# Altium PCB pcb_tigresse_experiment.PcbDoc
Units mil, origin at the board's own origin, x right, y up, seen from the top; angles counter-clockwise.
Board outline 2561.78 x 2561.78 mil, 6 copper layers (TopSIGN, TopGND, 3V3, SignCenter, BottomGND, BottomsSIGN), stack 32.112 mil thick; 48 components, 34 nets, 193 pads, 1 vias.
Unrouted connection lines stored in the file: 27.
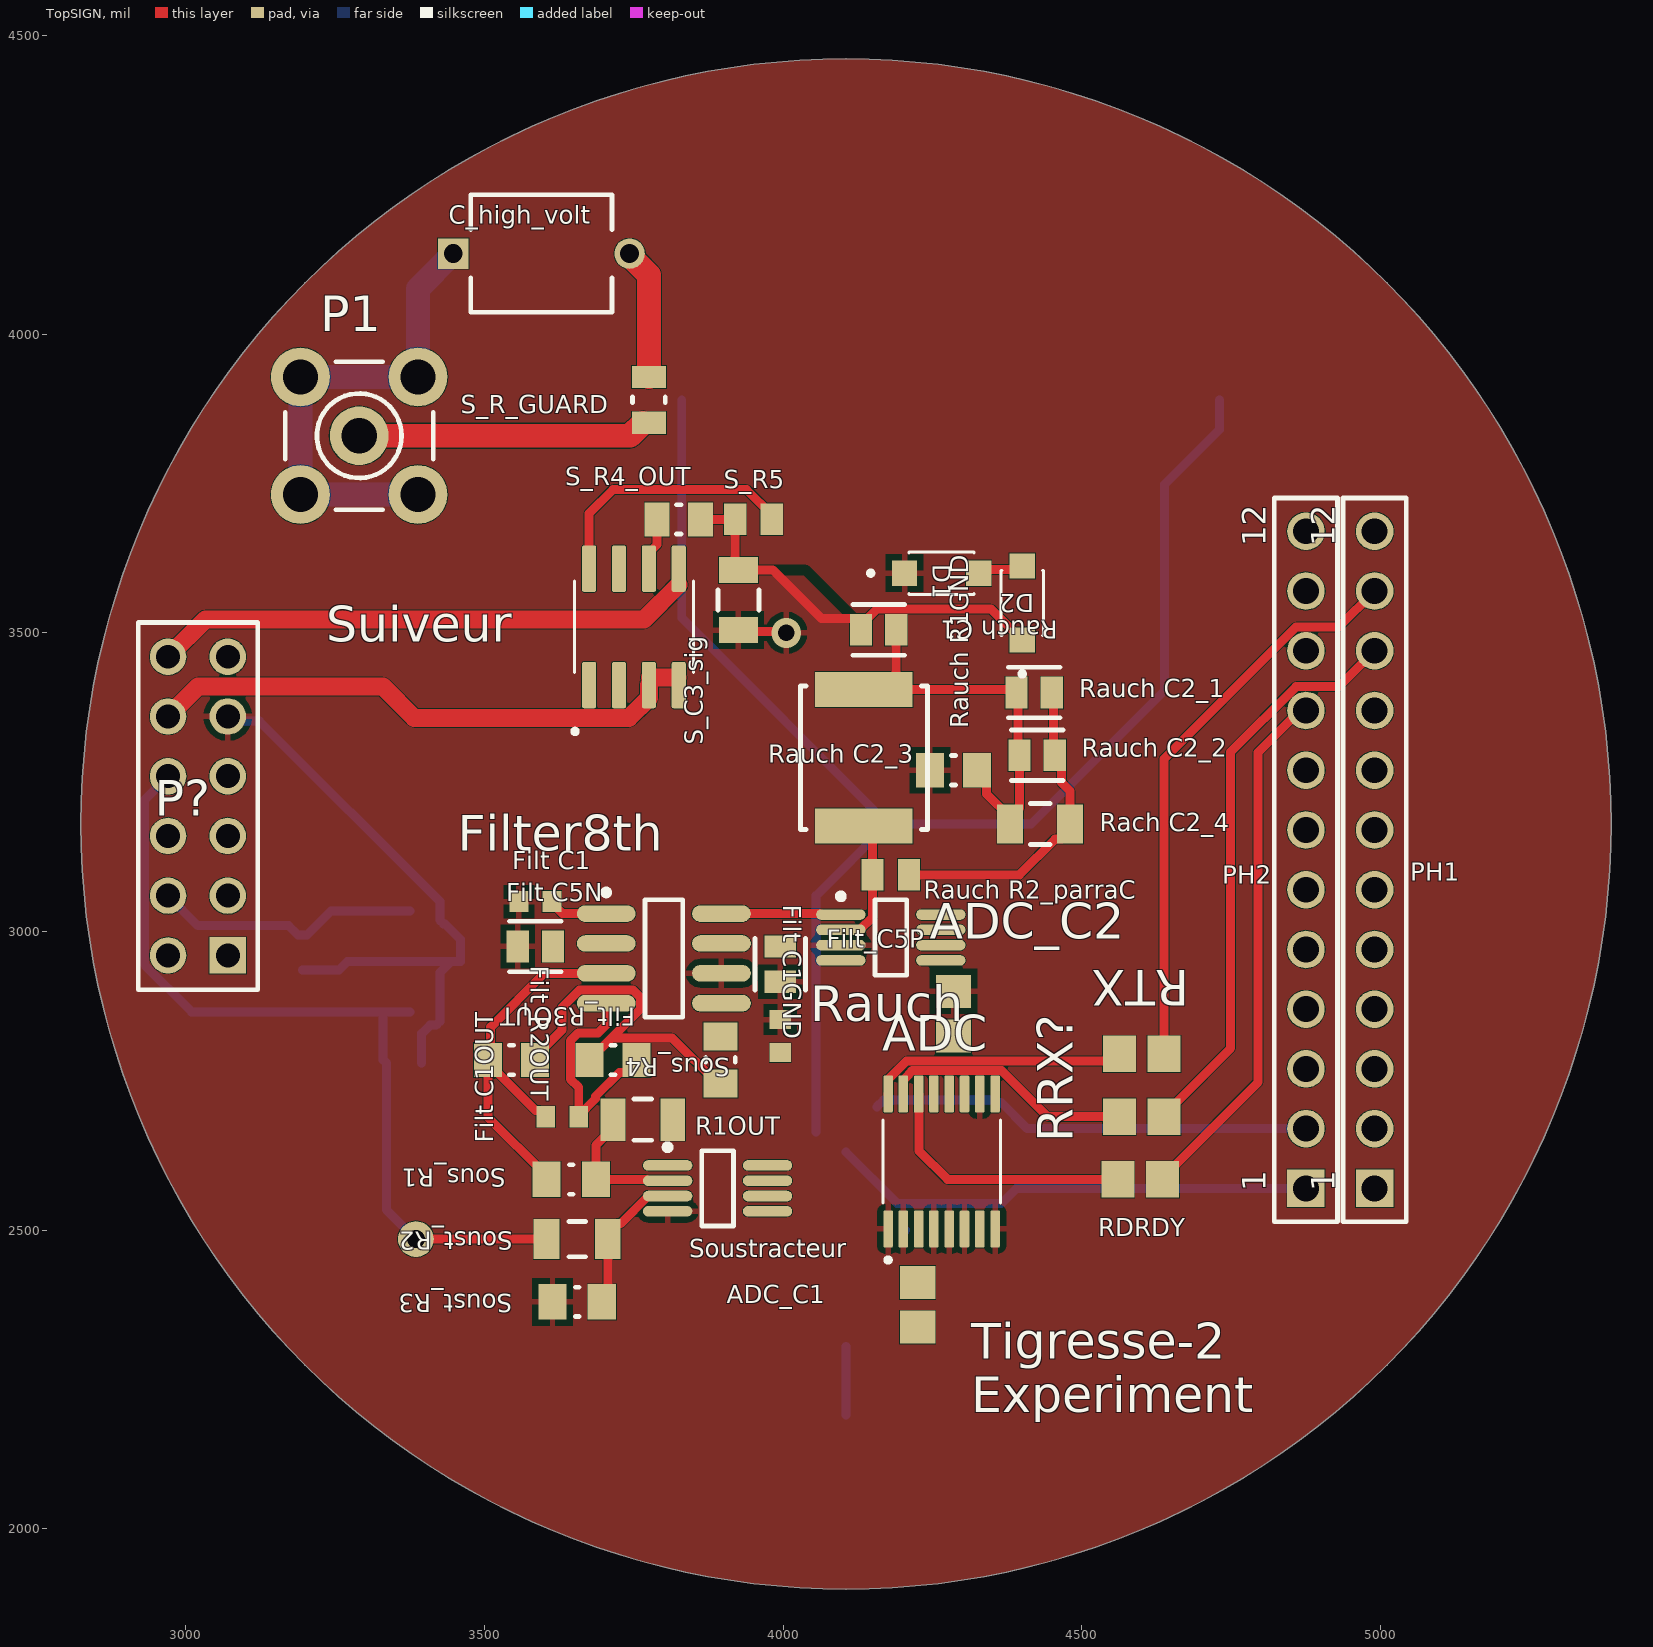
[diagram p0: TopSIGN view]
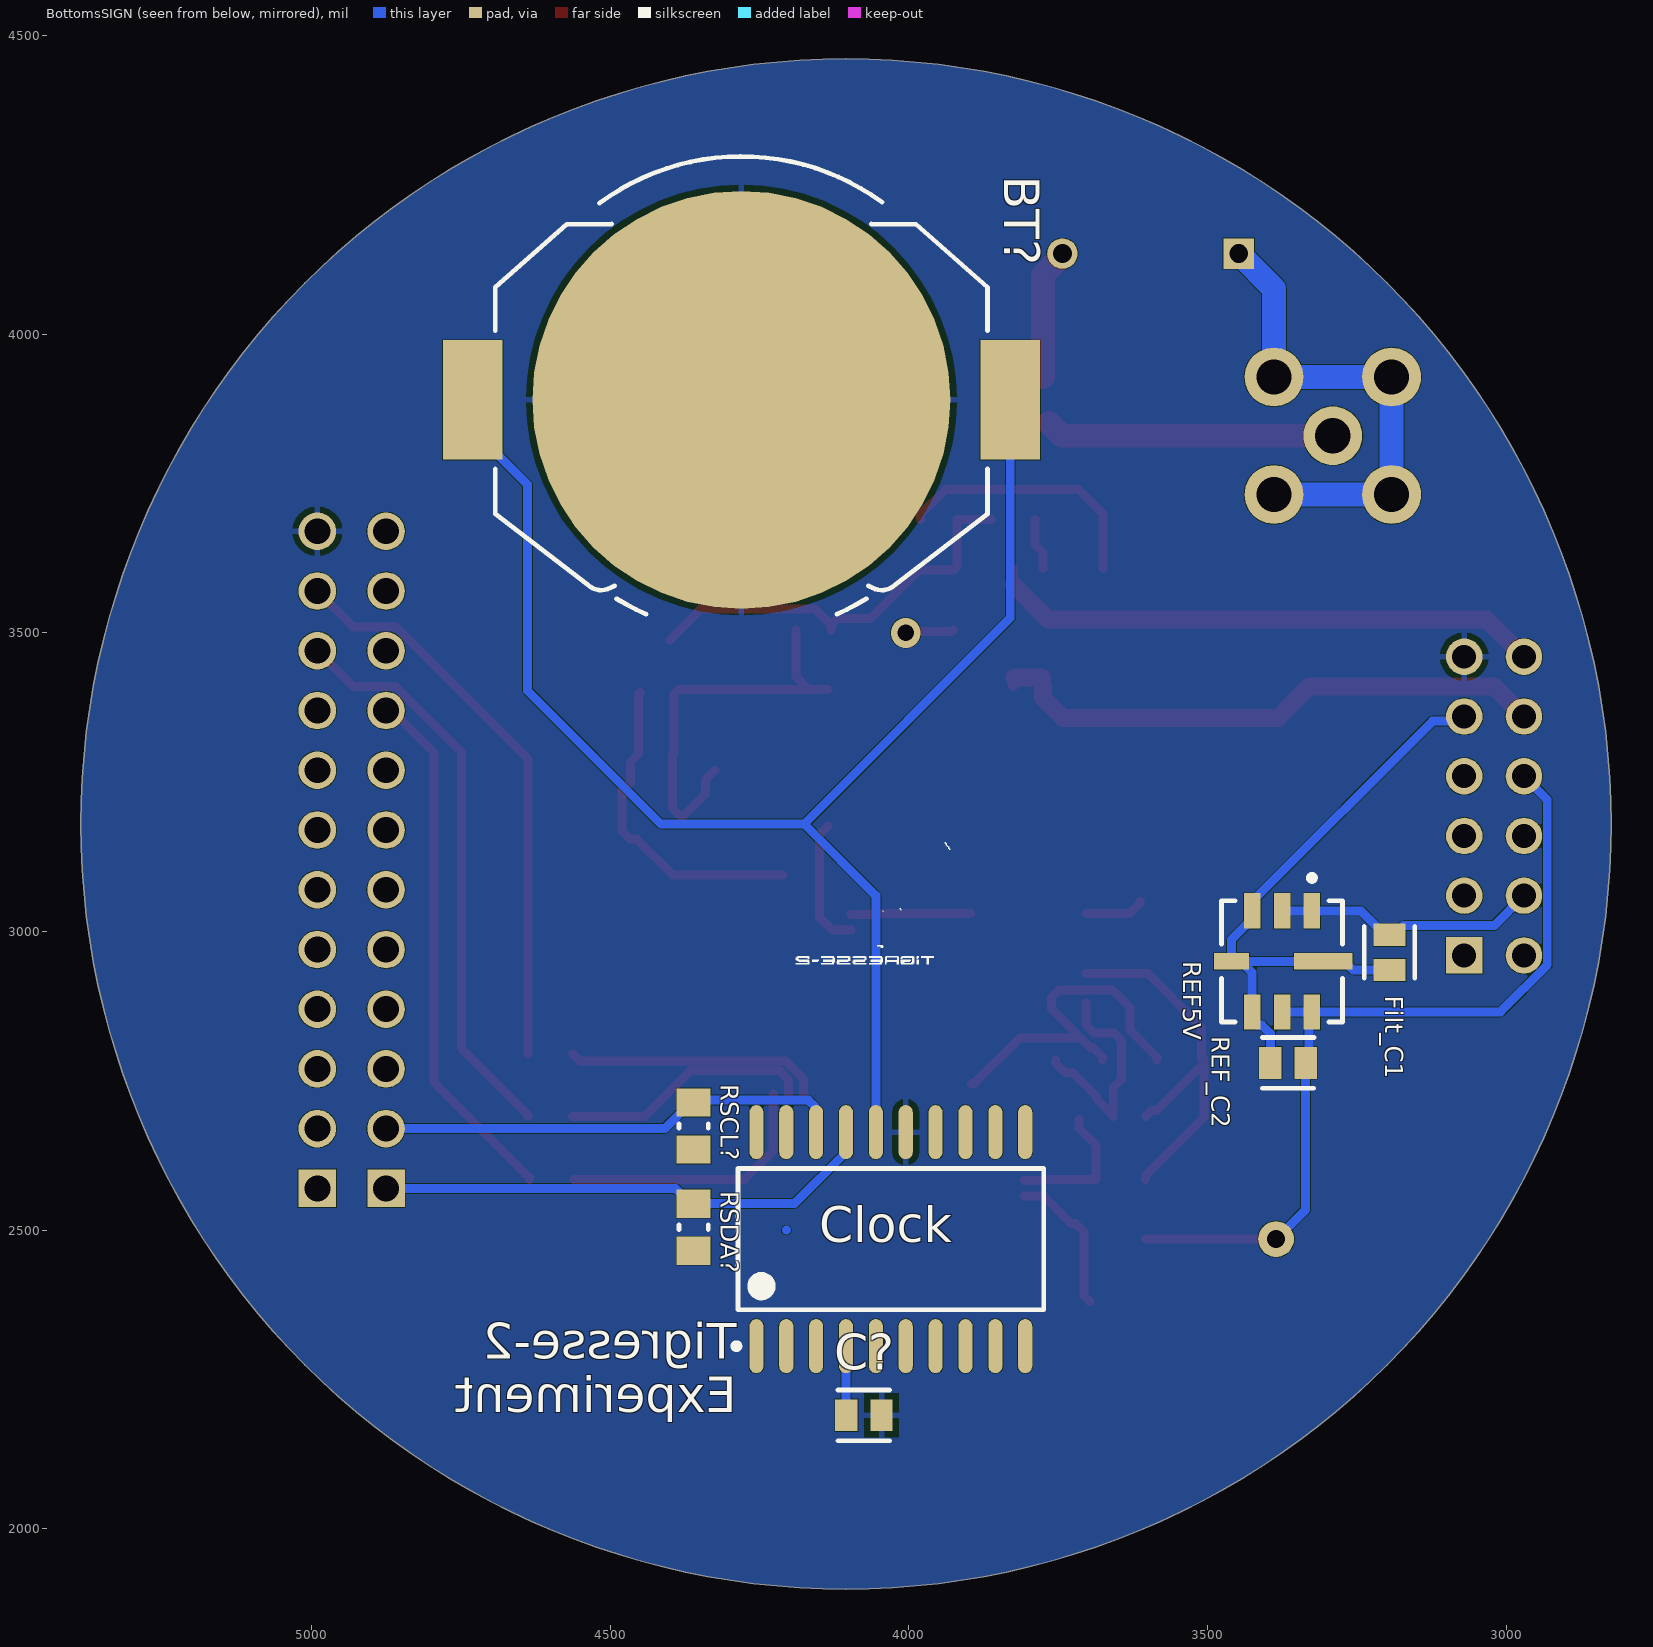
[diagram p1: BottomsSIGN view, seen from below]
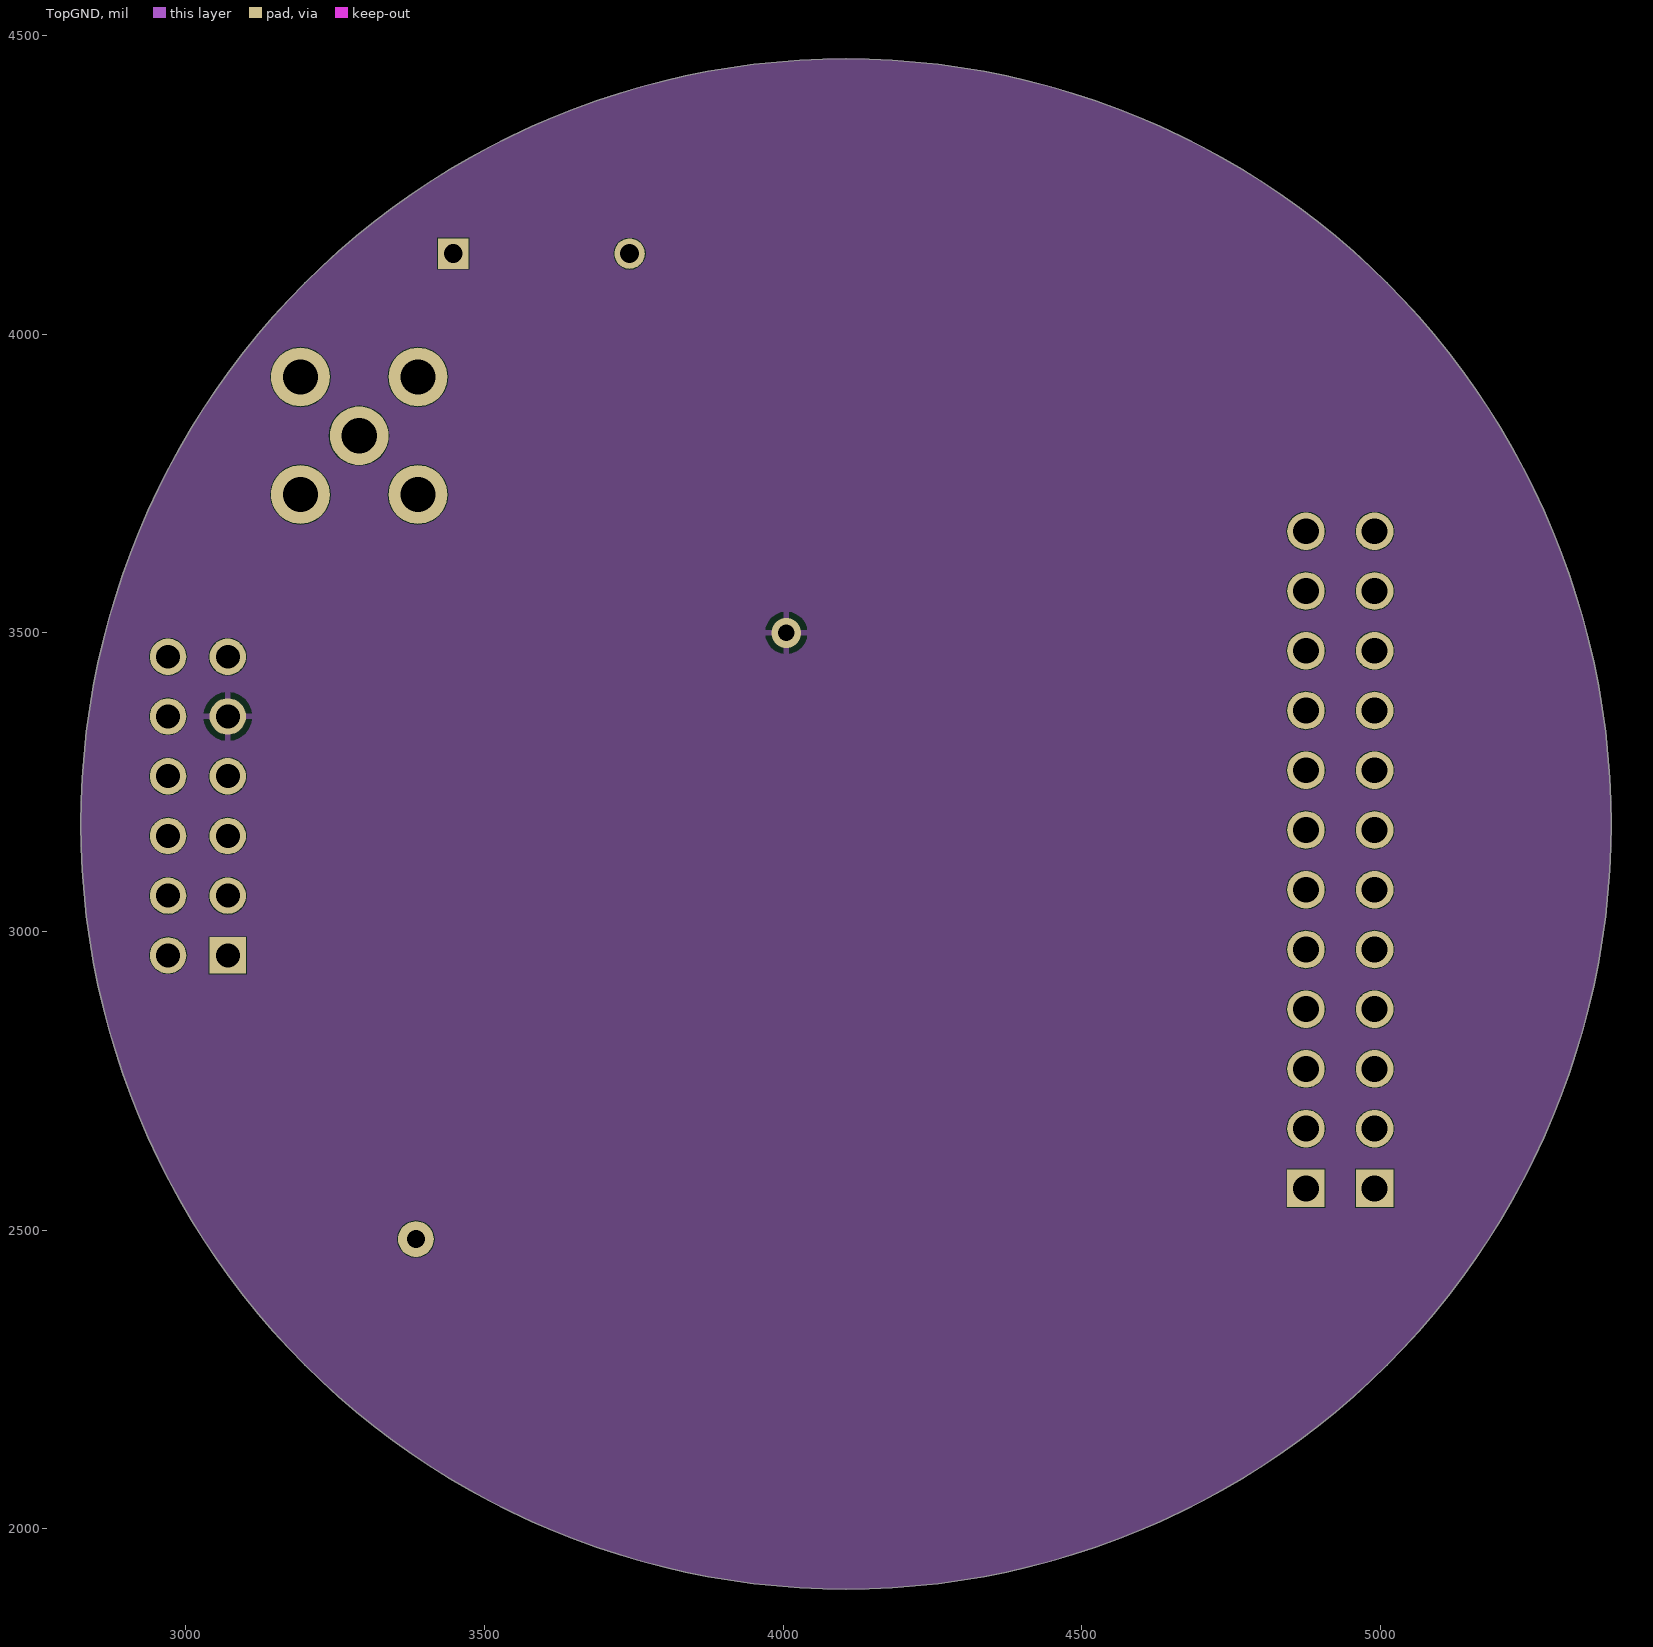
[diagram p2: TopGND]
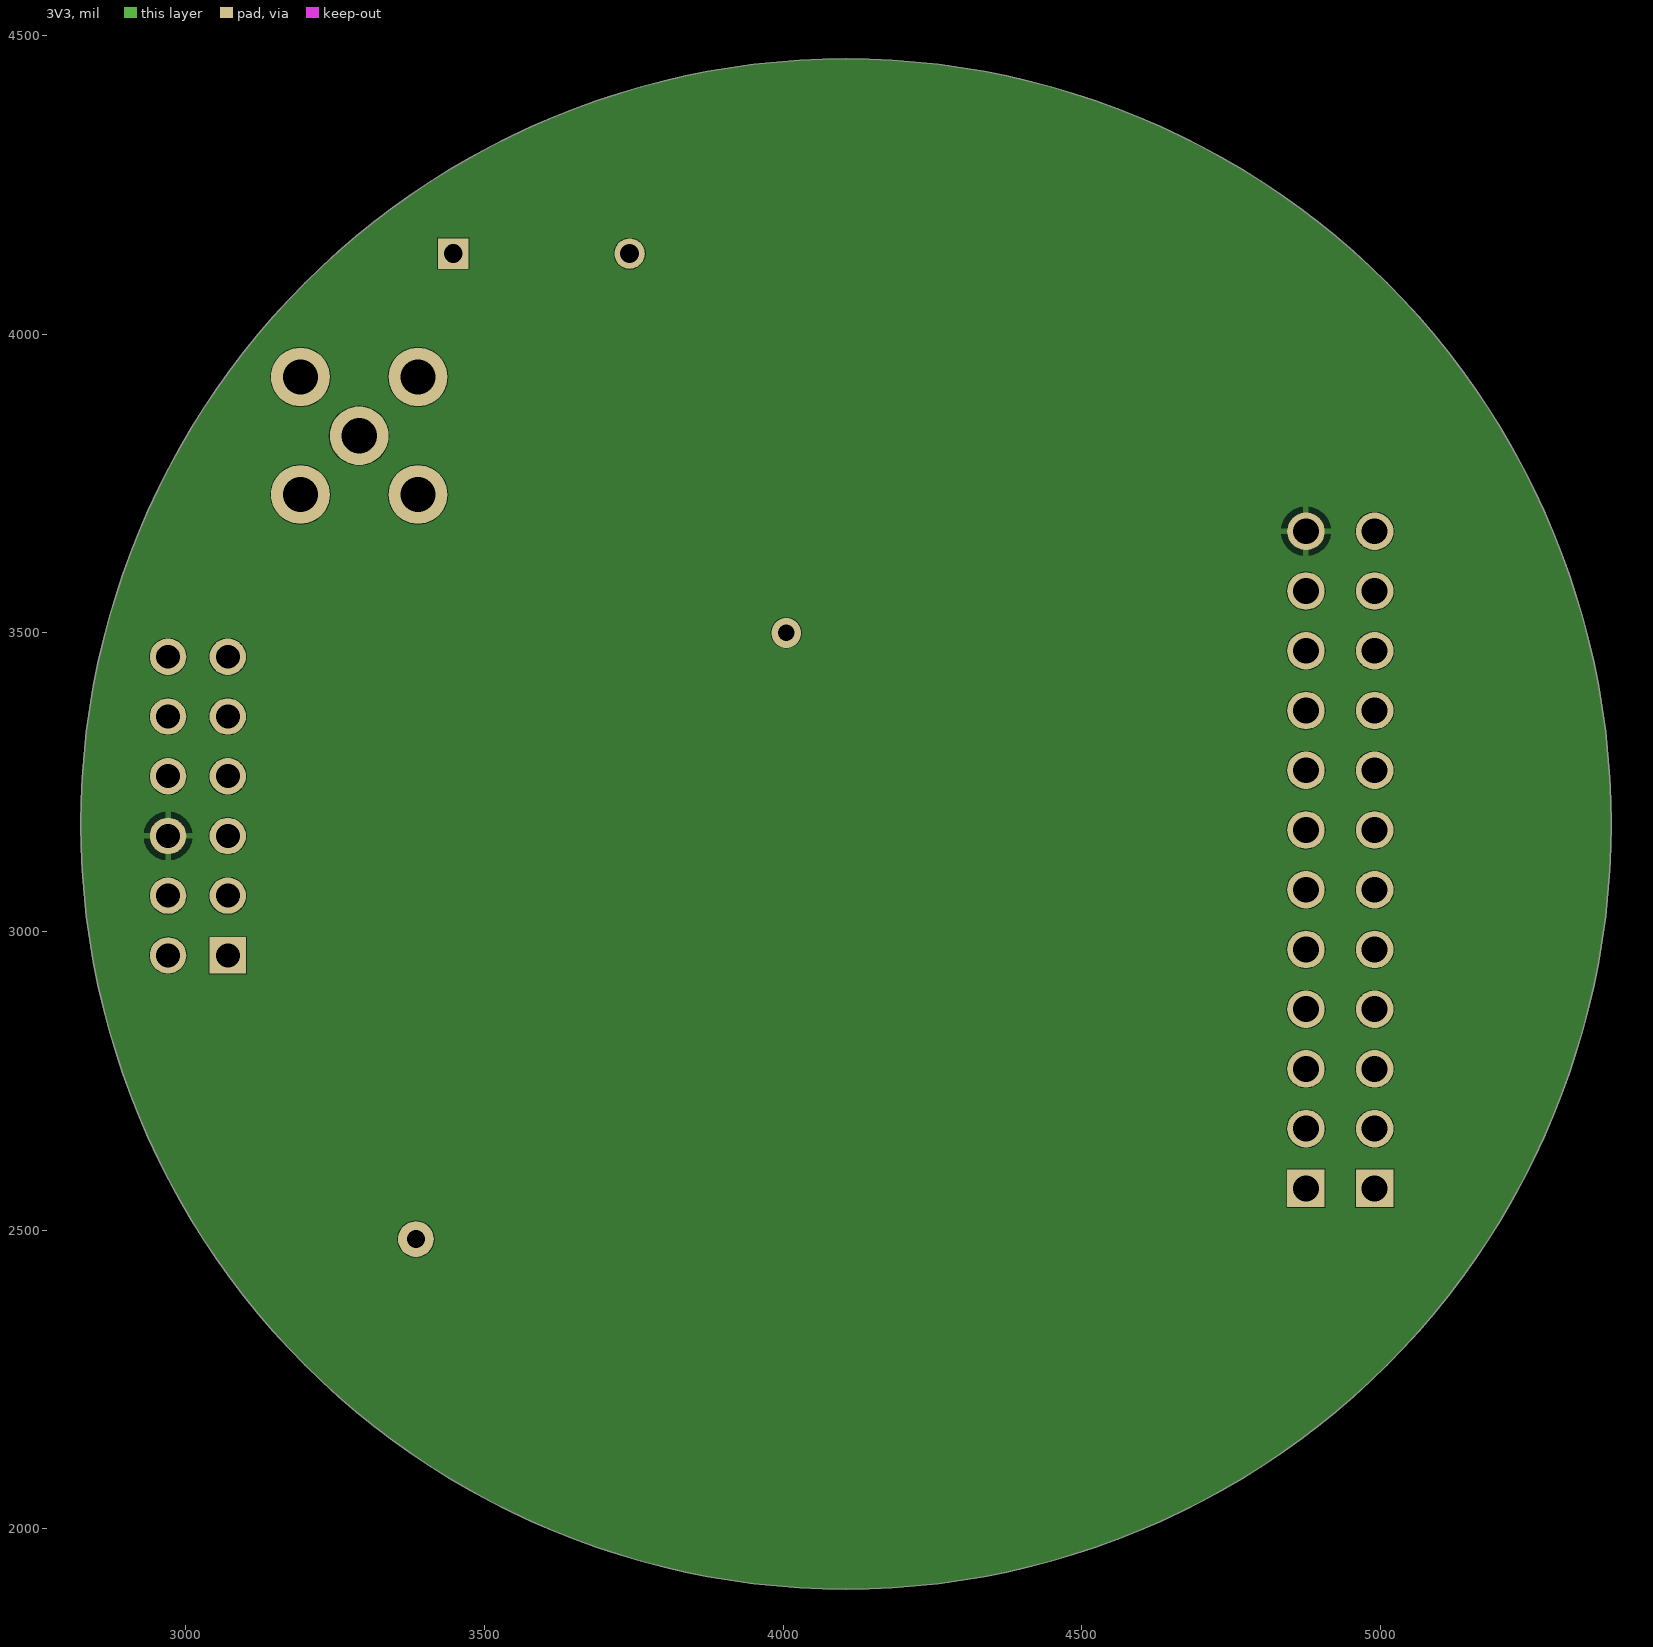
[diagram p3: 3V3]
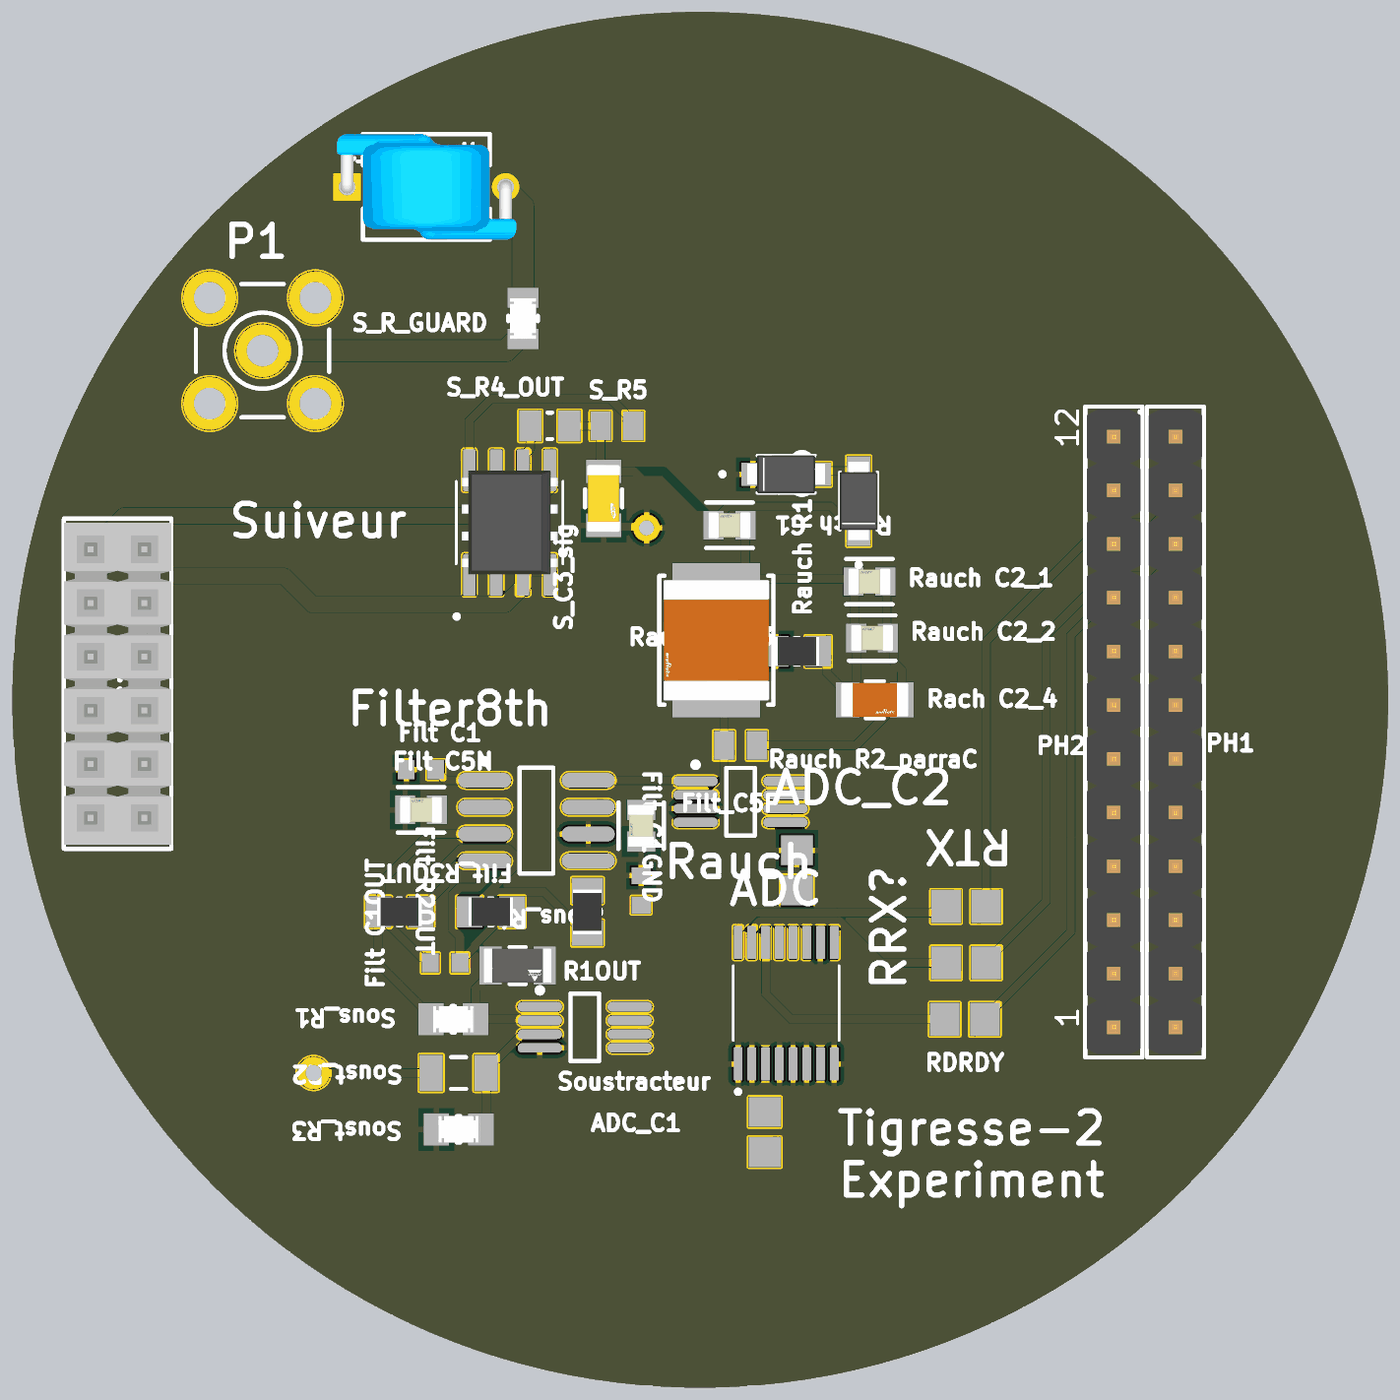
[diagram p4: 3D render of the assembled board from above, using the file's embedded part models]
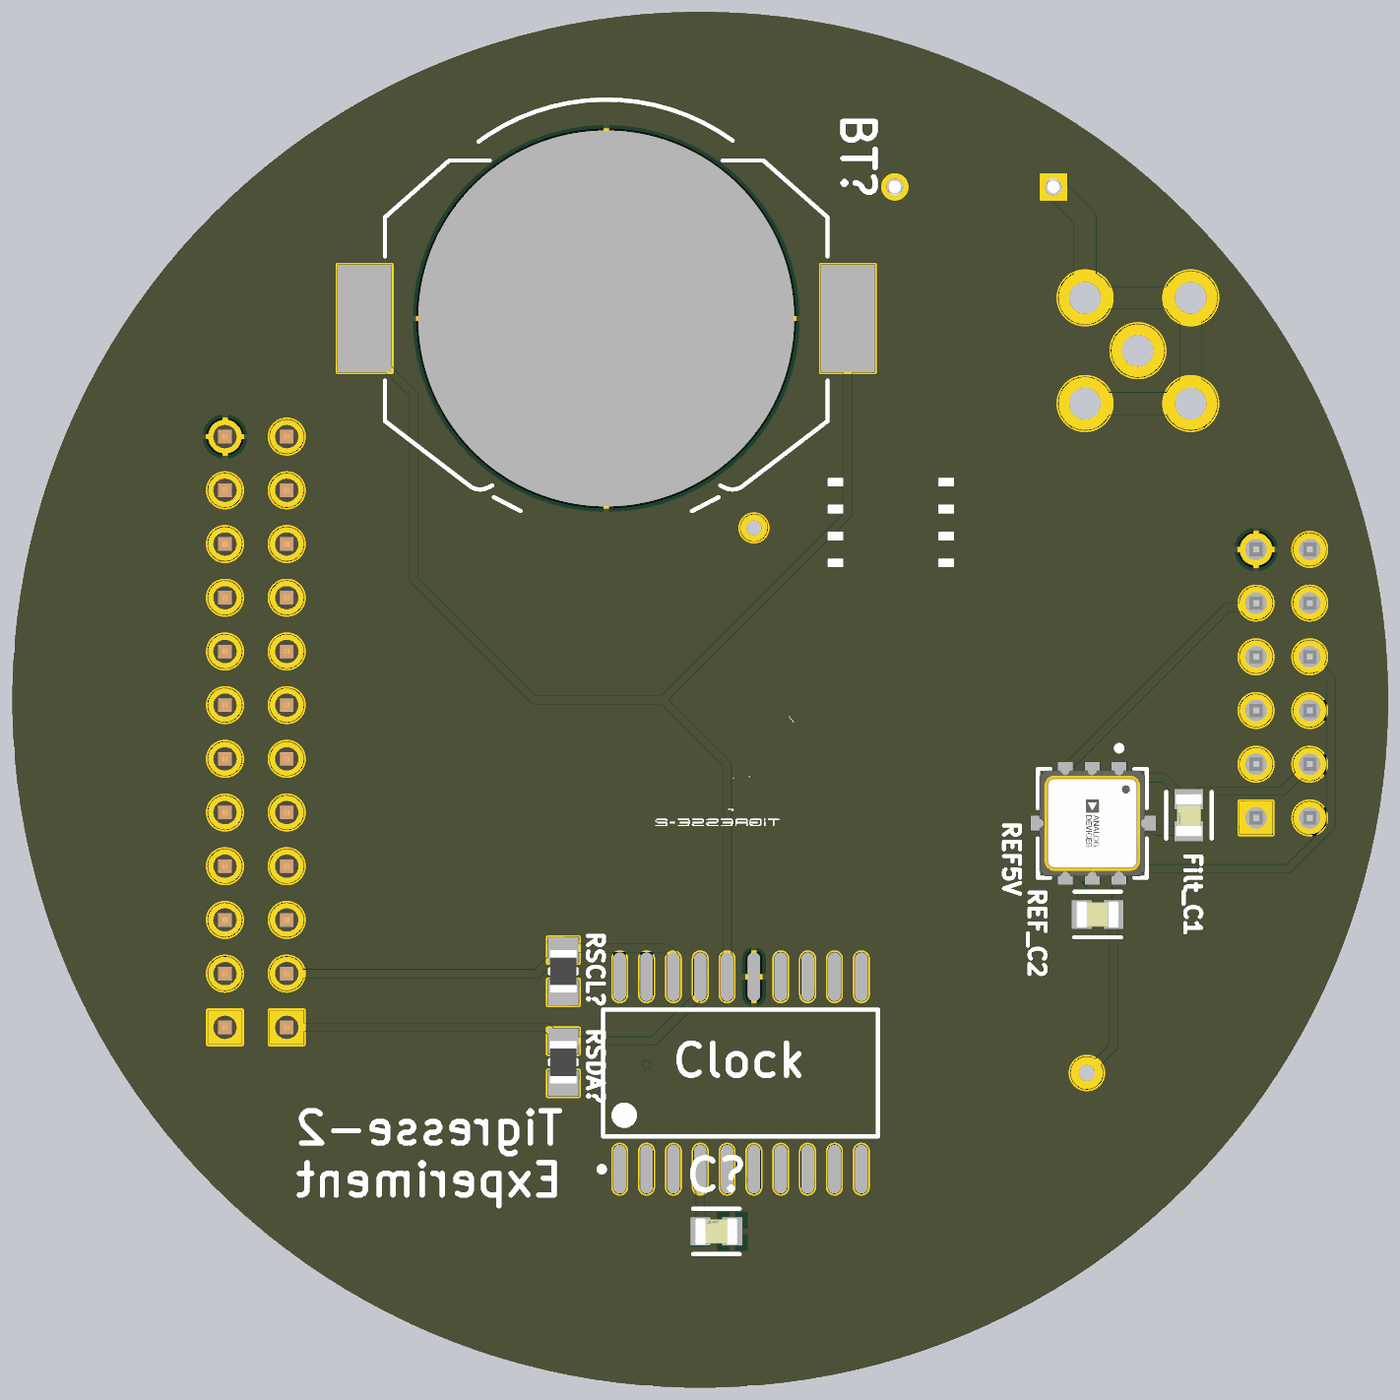
[diagram p5: 3D render of the assembled board from below, using the file's embedded part models]

## Layer stack, top to bottom
Top Solder: solder mask 0.4, Solder Resist, Dk 3.5
TopSIGN: signal copper 1.4
Dielectric 2: prepreg 2.8, PP-006, Dk 4.1
TopGND: signal copper 1.378
Dielectric 4: prepreg 2.8, PP-006, Dk 4.1
3V3: signal copper 1.378
Dielectric 1: dielectric 12.6, FR-4, Dk 4.8
SignCenter: signal copper 1.378
Dielectric 5: prepreg 2.8, PP-006, Dk 4.1
BottomGND: signal copper 1.378
Dielectric 3: prepreg 2.8, PP-006, Dk 4.1
BottomsSIGN: signal copper 1.4
Bottom Solder: solder mask 0.4, Solder Resist, Dk 3.5

## Board outline
2824.11,3180 ccw(c4105,3180) 4105,1899.11 ccw(c4105,3180) 5385.89,3180 ccw(c4105,3180) 4105,4460.89 ccw(c4105,3180)

## Design rules (kind name [scope] priority, off if disabled: settings)
Clearance [All] p1: gap=1 ignorepadtopadclearanceinfootprint=FALSE
Length [InNetClass('Horloge')] p1: maxlimit=500 minlimit=0
PolygonConnect [All] p1: connectstyle=Relief reliefconductorwidth=10 reliefentries=4 polygonreliefangle="90 Angle" airgapwidth=10
RoutingVias [All] p1: holewidth=28 width=50 viastyle="Through Hole" minholewidth=28 minwidth=50 maxholewidth=28 maxwidth=50
SolderMaskExpansion [All] p1: expansion=4 istentingtop=FALSE
Width [All] p1: maxlimit=50 minlimit=6 preferedwidth=10 toplayer_prefwidth=12 midlayer1_minwidth=10 midlayer1_maxwidth=10 midlayer2_minwidth=10 midlayer2_maxwidth=10 midlayer3_minwidth=10 midlayer3_maxwidth=10 midlayer4_minwidth=10 midlayer4_maxwidth=10 bottomlayer_prefwidth=12 minimp=50.000000 maximp=50.000000 favimp=50.000000
30 further rules are at their usual default settings.

## Classes and differential pairs
component class Pamp: ADC ADC_C1 ADC_C2 C2 C4 C8 C9 C_high_volt D1 D2 "Filt C1" "Filt C1GND" "Filt C1OUT" "Filt C5N" Filt_C1 Filt_C5P Filt_R2OUT Filt_R3OUT Filter8th P1 R1OUT "Rach C2_4" Rauch "Rauch C1" "Rauch C2_1" "Rauch C2_2" "Rauch C2_3" "Rauch R1GND" "Rauch R2_parraC" REF5V REF_C2 S_C3_sig S_R4_OUT S_R5 S_R_GUARD Sous_R1 Sous_R4 Soust_R2 Soust_R3 Soustracteur Suiveur
component class Data: BT1 BT? C15 C? Clock D3 P? PH1 PH2 RDRDY RRX? RSCL? RSDA? RTX U7

## Components (designator, comment, footprint, x,y, rotation, side; value= is the part's Value field where it differs from the comment)
ADC "ADS122U04IPWR" SOP65P640X120-16N 4265,2615 r90 top
ADC_C1 "GRM216R71H103KA01D" CAPC2013X70X45ML10T25 4225,2375 r90 top
ADC_C2 "GRM216R71H103KA01D" CAPC2013X70X45ML10T25 4285,2862.4 r270 top
BT? "BAT-HLD-001" BATHLD-001 4280,3890 r180 bottom
C? "C0805C104K5RACTU" FP-C0805C-DN-MFG 4075,2190 r180 bottom value="0.10 μF"
C_high_volt "DE2B3SA331KA3BY02F" FP-DE2_D6_T5_F7_5_d0_6-0-MFG 3595,4135 r0 top
Clock "DS3232SN#" W20#H2_N 4030,2485 r90 bottom
D1 "BZD27C200PWH" PCBComponent_1 4255,3595 r0 top
D2 "BZD27C200PWH" PCBComponent_1 4405,3540 r90 top
"Filt C1" "NPO/25V" 1608[0603] 3585,3050 r180 top value=2.6nF
"Filt C1GND" "NPO/25V" 1608[0603] 3995,2825 r270 top
"Filt C1OUT" "NPO/25V" 1608[0603] 3630,2690 r180 top
"Filt C5N" "C0805C104K5RACTU" FP-C0805C-DN-MFG 3585,2975 r0 top value="0.10 μF"
Filt_C1 "C0805C104K5RACTU" FP-C0805C-DN-MFG 3195,2965 r90 bottom value="0.10 μF"
Filt_C5P "C0805C104K5RACTU" FP-C0805C-DN-MFG 3995,2945.47 r90 top value="0.10 μF"
Filt_R2OUT "RC0805FR-07100KL" RESC2013X60X35ML10T20 3715,2785 r0 top
Filt_R3OUT "RC0805FR-07100KL" RESC2013X60X35ML10T20 3545,2785 r180 top
Filter8th "MAX295CSA" MAXM-S8-5_M 3800,2955 r0 top
P1 "SMA" SMB_V-RJ45 3290,3830 r270 top
P? "TSW-106-07-G-D" SMTC-TSW-106-07-X-D 3070,2960 r90 top
PH1 "61301211121" 61301211121 4990,3120 r90 top locked
PH2 "61301211121" 61301211121 4875,3120 r90 top locked
R1OUT "RC0805FR-07100KL" RESC2013X60X35ML10T20 3895,2785 r270 top
"Rach C2_4" "GRM3195C1H203JA01D" FP-GRM319-0_15-IPC_C 4430,3180 r0 top
Rauch "AD8642ARMZ" ADI-RM-8_M 4180,2990 r0 top
"Rauch C1" "C0805C104K5RACTU" FP-C0805C-DN-MFG 4159.53,3505 r0 top value="0.10 μF"
"Rauch C2_1" "C0805C223K5RACTU" FP-C0805C-DN-MFG 4420,3400 r0 top value="22,000 pF"
"Rauch C2_2" "C0805C104K5RACTU" FP-C0805C-DN-MFG 4425,3295 r0 top value="0.10 μF"
"Rauch C2_3" "GRM55DR72E105KW01L" FP-GRM55D-0_4-MFG 4135,3290.83 r270 top
"Rauch R1GND" "RC0805FR-07100KL" RESC2013X60X35ML10T20 4285,3270 r0 top
"Rauch R2_parraC" "ERJ-6ENF2003V" RESC2013X70X40LL20T20 4180,3095 r0 top
RDRDY "ERA6AEB473V" RESC2013X60X40ML20T25 4597.6,2585 r180 top
REF5V "LTC6655CHLS8-4.096#PBF" FP-LS8-8-05-08-1852-MFG 3375,2950 r270 bottom
REF_C2 "C0805C106K8PACTU" FP-C0805C-DG-MFG 3365,2780 r0 bottom value=10uF
RRX? "ERA6AEB473V" RESC2013X60X40ML20T25 4600,2690 r180 top
RSCL? "RC0805FR-074K7L" YAGO-RC0805_M 4360,2674.37 r90 bottom
RSDA? "RC0805FR-074K7L" YAGO-RC0805_M 4360,2505 r90 bottom
RTX "ERA6AEB473V" RESC2013X60X40ML20T25 4600,2795 r180 top
S_C3_sig "CL31C221JGFNNNF" FP-CL31-IPC_C 3925,3555 r270 top
S_R4_OUT "CRCW08051K00FKEA" RESC2013X50X30NL20T20 3825,3690 r0 top
S_R5 "ERJ-6ENF1500V" RESC2013X70X40LL20T20 3950,3690 r180 top
S_R_GUARD "CRCW0805100KFKEA" FP-CRCW0805-e3-MFG 3775,3890 r270 top
Sous_R1 "CRCW0805240KFKEA" FP-CRCW0805-e3-IPC_A 3645,2585 r0 top
Sous_R4 "CRCW1206150KFKEA" FP-CRCW1206-e3-MFG 3765,2685 r0 top
Soust_R2 "ERA8AEB274V" RESC3216X70X50LL20T25 3655,2485 r0 top
Soust_R3 "CRCW0805120KFKEA" FP-CRCW0805-e3-IPC_A 3655,2380 r0 top
Soustracteur "AD8642ARMZ" ADI-RM-8_M 3890,2570 r0 top
Suiveur "ADA4530-1" SOIC127P600X175-8N 3750,3510 r90 top

## Footprints (in the part's own frame and the unit in brackets; to place one, negate y for a bottom-side part, rotate by r counter-clockwise, add the part's x,y. Pads: shape width x height; smd on the part's side, far side on the other; paste and mask are expansions set on the pad)
1608[0603] [mm] "Chip Capacitor, Body 1.6x0.8mm, IPC High Density"
  rect 0.8x0.9 smd: 1(-0.7,0) 2(0.7,0)
  body extent -0.87,-0.48 0.87,0.48, height 1.3
61301211121 [mm] "Pin Header, pitch 2.54 mm, THT, Vertical, single row, 12p"
  rect 1.6x1.6 hole 1.1: 1(-13.97,0)
  round 1.6 hole 1.1: 2(-11.43,0) 3(-8.89,0) 4(-6.35,0) 5(-3.81,0) 6(-1.27,0) 7(1.27,0) 8(3.81,0) 9(6.35,0) 10(8.89,0) 11(11.43,0) 12(13.97,0)
  silkscreen extent -15.39,-1.35 15.39,1.35, body extent -15.24,-1.27 15.24,1.27, height 8.57
ADI-RM-8_M [mm] "SOP, 8-Leads, Body 3x3mm, Pitch 0.65mm, IPC Low Density"
  oval 2.1x0.45 smd: 1(-2.125,0.975) 2(-2.125,0.325) 3(-2.125,-0.325) 4(-2.125,-0.975) 5(2.125,-0.975) 6(2.125,-0.325) 7(2.125,0.325) 8(2.125,0.975)
  silkscreen extent -2.25,-1.6 0.67,1.87, body extent -1.6,-1.6 1.6,1.6, height 1.1
BATHLD-001 [mil] "LINX CR2032 BATTERY HOLDER"
  round 700 smd: 1(0,0)
  rect 100x200 smd: 2(-450,0) 3(450,0)
  silkscreen extent -412,-359 412,408, body extent -406,-392 406,409, height 169
CAPC2013X70X45ML10T25 [mm] "Chip Capacitor, 2-Leads, Body 2.00x1.25mm, IPC Low Density"
  rect 1.4x1.5 smd: 1(-0.95,0) 2(0.95,0)
  body extent -1.05,-0.67 1.05,0.67, height 0.7
FP-C0805C-DG-MFG [mm]
  rect 0.95x1.35 smd paste+0 mask+0: 1(-0.75,0) 2(0.75,0)
  silkscreen extent -1.11,-1.08 1.1,1.07, body extent -1,-0.63 1,0.63, height 1.4
FP-C0805C-DN-MFG [mm]
  rect 0.95x1.35 smd paste+0 mask+0: 1(-0.75,0) 2(0.75,0)
  silkscreen extent -1.1,-1.07 1.1,1.07, body extent -1,-0.63 1,0.63, height 0.88
FP-CL31-IPC_C [mil]
  rect 43.52x65.28 smd paste+0 mask+0: 1(-50.25,0) 2(50.25,0)
  silkscreen extent -17,-34 17,34, body extent -76,-38 76,38, height 10
FP-CRCW0805-e3-IPC_A [mil]
  rect 47.5x59.38 smd paste+0 mask+0: 1(-41.37,0) 2(41.37,0)
  silkscreen extent -3,-25 3,25, body extent -85,-49 85,49, height 10
FP-CRCW0805-e3-MFG [mm]
  rect 0.95x1.45 smd paste+0 mask+0: 1(-0.975,0) 2(0.975,0)
  silkscreen extent -0.13,-0.7 0.13,0.7, body extent -1.55,-0.82 1.55,0.82, height 0.25
FP-CRCW1206-e3-MFG [mm]
  rect 1.05x1.8 smd paste+0 mask+0: 1(-1.275,0) 2(1.275,0)
  silkscreen extent -0.38,-0.87 0.38,0.87, body extent -1.9,-1 1.9,1, height 0.25
FP-DE2_D6_T5_F7_5_d0_6-0-MFG [mm]
  rect 1.3x1.3 hole 0.8 paste-1000 mask+0: 1(-3.75,0)
  round 1.3 hole 0.8 paste-1000 mask+0: 2(3.75,0)
  silkscreen extent -3,-2.5 3,2.5, body extent -4.5,-2.6 4.5,2.6, height 0.25
FP-GRM55D-0_4-MFG [mm]
  rect 1.5x4.15 smd paste+0 mask+0: 1(-2.9,0) 2(2.9,0)
  silkscreen extent -3.05,-2.7 3.05,2.7, body extent -3.75,-2.8 3.75,2.8, height 0.25
FP-GRM319-0_15-IPC_C [mil]
  rect 43.53x65.28 smd paste+0 mask+0: 1(-50.25,0) 2(50.25,0)
  silkscreen extent -17,-34 17,34, body extent -76,-38 76,38, height 10
FP-LS8-8-05-08-1852-MFG [mm]
  rect 1.5x0.7 smd paste+0 mask+0: 1(-2.15,1.27) 2(-2.15,0) 3(-2.15,-1.27) 5(2.15,-1.27) 6(2.15,0) 7(2.15,1.27)
  rect 0.7x1.5 smd paste+0 mask+0: 4(0,-2.15)
  rect 0.7x2.5 smd paste+0 mask+0: 8(0,1.75)
  silkscreen extent -3.67,-2.58 2.58,2.58, body extent -2.5,-2.5 2.5,2.5, height 1.55
MAXM-S8-5_M [mm] "SOIC, 8-Leads, Body 4.9x3.9mm, Pitch 1.27mm, IPC Low Density"
  oval 2.5x0.7 smd: 1(-2.45,1.905) 2(-2.45,0.635) 3(-2.45,-0.635) 4(-2.45,-1.905) 5(2.45,-1.905) 6(2.45,-0.635) 7(2.45,0.635) 8(2.45,1.905)
  silkscreen extent -2.57,-2.5 0.8,2.93, body extent -2,-2.5 2,2.5, height 1.75
PCBComponent_1 [mm]
  rect 1.08x1.09 smd: A(1.829,0.127) C(-1.321,0.127)
  silkscreen extent -2.86,-0.77 1.63,1.03, body extent -1.6,-0.77 2.1,1.03, height 1.02
RESC2013X50X30NL20T20 [mm] "Chip Resistor, 2-Leads, Body 2.00x1.25mm, IPC Medium Density"
  rect 1.05x1.45 smd: 1(-0.925,0) 2(0.925,0)
  silkscreen extent -0.1,-0.63 0.1,0.63, body extent -1.1,-0.72 1.1,0.72, height 0.5
RESC2013X60X35ML10T20 [mm] "Chip Resistor, 2-Leads, Body 2.1x1.35mm, IPC Low Density"
  rect 1.2x1.45 smd: 1(-1,0) 2(1,0)
  silkscreen extent -0.1,-0.63 0.1,0.63, body extent -1.05,-0.68 1.05,0.67, height 0.6
RESC2013X60X40ML20T25 [mm] "Chip Resistor, 2-Leads, Body 2.00x1.25mm, IPC Low Density"
  rect 1.4x1.55 smd: 1(-0.95,0) 2(0.95,0)
  body extent -1.1,-0.72 1.1,0.72, height 0.6
RESC2013X70X40LL20T20 [mm] "Chip Resistor, 2-Leads, Body 2.00x1.25mm, IPC High Density"
  rect 0.95x1.35 smd: 1(-0.775,0) 2(0.775,0)
  body extent -1.1,-0.72 1.1,0.72, height 0.7
RESC3216X70X50LL20T25 [mm] "Chip Resistor, 2-Leads, Body 3.20x1.60mm, IPC High Density"
  rect 1.1x1.7 smd: 1(-1.3,0) 2(1.3,0)
  silkscreen extent -0.35,-0.75 0.35,0.75, body extent -1.7,-0.9 1.7,0.9, height 0.7
SMB_V-RJ45 [mm] "Connector; SMB Straight"
  round 2.5 hole 1.5: 1(0,0) 2(-2.5,2.5) 2(-2.5,-2.5) 2(2.5,2.5) 2(2.5,-2.5)
  silkscreen extent -3.15,-3.15 3.15,3.15
SMTC-TSW-106-07-X-D [mm] ".025 SQ Post Terminal Strip Assembly, 2x6 Pins, Vertical, 2.54mm Pitch, Male"
  rect 1.55x1.55 hole 1.02: 1(0,0)
  round 1.55 hole 1.02: 2(0,2.54) 3(2.54,0) 4(2.54,2.54) 5(5.08,0) 6(5.08,2.54) 7(7.62,0) 8(7.62,2.54) 9(10.16,0) 10(10.16,2.54) 11(12.7,0) 12(12.7,2.54)
  silkscreen extent -1.46,-1.27 14.16,3.81, body extent -1.27,-1.27 13.97,3.81, height 8.38
SOIC127P600X175-8N [mm]
  rrect25% 1.97x0.6 smd: 1(-2.475,1.905) 2(-2.475,0.635) 3(-2.475,-0.635) 4(-2.475,-1.905) 5(2.475,-1.905) 6(2.475,-0.635) 7(2.475,0.635) 8(2.475,1.905)
  silkscreen extent -4.54,-2.52 1.95,2.6, body extent -2.45,-3 2.45,3, height 0.75
SOP65P640X120-16N [mm]
  rrect25% 1.57x0.41 smd: 1(-2.87,2.275) 2(-2.87,1.625) 3(-2.87,0.975) 4(-2.87,0.325) 5(-2.87,-0.325) 6(-2.87,-0.975) 7(-2.87,-1.625) 8(-2.87,-2.275) 9(2.87,-2.275) 10(2.87,-1.625) 11(2.87,-0.975) 12(2.87,-0.325) 13(2.87,0.325) 14(2.87,0.975) 15(2.87,1.625) 16(2.87,2.275)
  silkscreen extent -4.29,-2.5 1.77,2.5
W20#H2_N [mm] "SOIC, 20-Leads, Body 12.8x7.5mm, Pitch 1.27mm, IPC Medium Density"
  oval 2.3x0.6 smd: 1(-4.55,5.715) 2(-4.55,4.445) 3(-4.55,3.175) 4(-4.55,1.905) 5(-4.55,0.635) 6(-4.55,-0.635) 7(-4.55,-1.905) 8(-4.55,-3.175) 9(-4.55,-4.445) 10(-4.55,-5.715) 11(4.55,-5.715) 12(4.55,-4.445) 13(4.55,-3.175) 14(4.55,-1.905) 15(4.55,-0.635) 16(4.55,0.635) 17(4.55,1.905) 18(4.55,3.175) 19(4.55,4.445) 20(4.55,5.715)
  silkscreen extent -4.67,-6.5 3,6.69, body extent -3.8,-6.5 3.8,6.5, height 2.65
YAGO-RC0805_M [mm] "Chip Resistor, 2-Leads, Body 2.00x1.25mm, IPC Low Density"
  rect 1.2x1.45 smd: 1(-1,0) 2(1,0)
  silkscreen extent -0.1,-0.63 0.1,0.63, body extent -1,-0.62 1,0.63, height 0.6

## Part data
ADC: Package=None, Availability=Unavailable, MP=ADS122U04IPWR, Price=None
ADC_C1 ADC_C2: library part CMP-2000-05013-1, "Chip Capacitor, 10 nF, +/- 10%, 50 V, -55 to 125 degC, 0805 (2012 Metric), RoHS, Tape and Reel", Capacitance=0.01uF, Capacitance - nF=10nF, Capacitance - pF=10000pF, Case Code - in=0805, Case Code - mm=2012, Case Height=0.6mm, Case Length=2mm, Case Width=1.25mm, Dielectric=X7R, Manufacturer=Murata, Maximum Operating Temperature=+125C, Minimum Operating Temperature=-55C, Operating Temperature Range=-55Cto+125C, Package / Case=0805(2012metric), Temperature Coefficient / Code=+/-15%, Tolerance=10%, Voltage Rating=50V, Brand=MurataElectronics, Datasheet URL=https://datasheet.ciiva.com/29201/452521-da-01-en-vs-kondensator-0805-29201121.pdf, Datasheet Version=Dec-10, Dimensions=1.25mmWx2mmLx0.6mmH, Factory Pack Quantity=4000, Manufacturer URL=http://www.murata.com/, Packaging=Reel, Product=GeneralTypeMLCCs, Product Category=MultilayerCeramicCapacitorsMLCC-SMD/SMT, RoHS=Details, Series=GRM, Termination Style=SMD/SMT, Type=GeneralPurposeMLCC, Voltage Rating DC=50V
BT?: library part CMP-0168-00043-1, "20mm Coin Cell Battery Holder", DatasheetVersion="rev1.0, Dec-2007", PackageDescription="Low Profile SM Battery Holder, 20mm Lithium Cell, 21.1 x 15.3 x 4.2 mm Body", PackageReference=BATHLD-001, PackageVersion="rev1.0, Dec-2007", PCB_Layout="Complies with manufacturer's recommendation."
C? "Filt C5N" Filt_C1 Filt_C5P "Rauch C1" "Rauch C2_2": library part CMP-2007-00279-2, "CAP CER 0.1UF 50V X7R 0805", Capacitance="0.10 μF", Manufacturer=KEMET, Package=C0805C-DN, Temperature="-55°C to +125°C", Temperature Characteristic=X7R, Temperature Coefficient=30ppm/°C, Temperature Range High=+125°C, Temperature Range Low=-55°C, Tolerance=0.1, Voltage Rating="50 V", Automotive=No, Category=Cap, ComponentLink2Description=Datasheet, ComponentLink2URL=https://content.kemet.com/datasheets/KEM_C1003_C0G_SMD.pdf, Device Class L1="Passive Components", Device Class L2=Capacitors, Device Class L3="Ceramic Capacitors", Digikey Description="CAP CER 0.1UF 50V X7R 0805", Height=0.88mm, Ipc Land Pattern Name=CAPC200125X78, Lead Free=Yes, Manufacturer Part Number=C0805C104K5RACTU, Material=Ceramic, Mouser Description="Cap Ceramic 0.1uF 50V X7R 10% SMD 2.0 x 1.2 mm 125 C Paper T/R", Octopart=https://octopart.com/c0805c104k5ractu-kemet-143926, RoHS=TRUE
C_high_volt: library part CMP-06035-062106-1, "Cap Ceramic Disc 330pF 10% 400VAC Thru-Hole 6.0x5.0x7.5 Bulk"
Clock: library part CMP-0254-00381-1, "Extremely Accurate I2C-Integrated Real-Time Clock/TCXO/Crystal and SRAM, 20-Pin SO, -40 to 85 degC, RoHS Qualified", Code_IPC=SOIC127P1030-20, Code_JEDEC=MS-013-AC, ComponentLink1Description="Manufacturer URL", ComponentLink1URL=http://www.maxim-ic.com, ComponentLink2Description=Datasheet, ComponentLink2URL=http://datasheets.maxim-ic.com/en/ds/DS3232.pdf, ComponentLink3Description="Package Specification", ComponentLink3URL=http://pdfserv.maxim-ic.com/package_dwgs/21-0042.PDF, DatasheetVersion="Rev 5, Jul-2010", PackageDescription="20-Pin Small-Outline IC, Wide (0.3in), 1.27 mm Pitch, SOIC (W), RoHS Qualified", PackageReference=W20#H2, PackageVersion="revD, 2010"
"Filt C1" "Filt C1GND" "Filt C1OUT": library part "Cap Semi", "Capacitor (Semiconductor SIM Model)", LatestRevisionDate=29-May-2009, LatestRevisionNote="IPC-7351 Footprint Added.", PackageDescription="Chip Capacitor", PackageReference=C1206, Published=8-Jun-2000, Publisher="Altium Limited"
Filt_R2OUT Filt_R3OUT R1OUT "Rauch R1GND": library part CMP-2100-03668-1, "Chip Resistor, 100 KOhm, +/- 1%, 0.125 W, -55 to 155 degC, 0805 (2012 Metric), RoHS, Tape and Reel", Case Code (Imperial)=0805, Case Code (Metric)=2012, Manufacturer=Yageo, Max Operating Temperature=155degC, Max Power Dissipation=125mW, Min Operating Temperature=-55degC, Package Description="2-Pin Surface Mounted Device, Body 2 x 1.25 mm", Package Quantity=1, Resistance=100KOhm, Temperature Coefficient=100ppm/degreesC, Tolerance=1%, Voltage Rating=150V, Case/Package=0805, Composition=ThickFilm, Datasheet URL=http://www.yageo.com/NewPortal/yageodocoutput?fileName=/pdf/R-Chip/PYu-RC_Group_51_RoHS_L_5.pdf, Datasheet Version="Rev. 5, 10/2016", Depth=1.25mm, Height=0.024inch, Lead Free=LeadFree, Lead Pitch=0.4mm, Length=2mm, Manufacturer URL=http://www.yageo.com/, Military Standard=Not, Number of Pins=2, Number of Terminations=2, Package Reference=0805, Packaging=TapeandReel, Power Rating=125mW, REACH SVHC=Unknown, RoHSCompliant=true, Termination=SMD/SMT, Voltage Rating (DC)=150V, Width=0.049inch
Filter8th: library part CMP-0026-00196-2, "8th-Order Switched Capacitor Lowpass Filter, Butterworth, Clock Tunable, 0 to 70 degC, 8-Pin SOIC (S8-5)", Generic Part Number=MAX295, Code_JEDEC=MS012, ComponentLink1Description="Manufacturer URL", ComponentLink1URL=http://www.maximintegrated.com/, ComponentLink2Description=Datasheet, ComponentLink2URL=http://datasheets.maximintegrated.com/en/ds/MAX291-MAX296.pdf, ComponentLink3Description="Package Specification", ComponentLink3URL=http://pdfserv.maximintegrated.com/package_dwgs/21-0041.PDF, DatasheetVersion="Rev. 5", Filter Characteristic=Butterworth, Filter Class="Switched Cap", Filter Sections=1, Filter Type=Lowpass, Mounting Technology="Surface Mount", Order Per Filter Section=8, PackageDescription="8-Pin Small-Outline IC, Narrow (0.15in) (S8-5), Body 4.90 x 3.90 mm, Pitch 1.27 mm", PackageReference=S8-5, PackageVersion="Rev. D, 10/2012", PartNumber=MAX295CSA, Program Method=Clock
P1: library part SMB, "SMA 90deg ConnectorR125680000", LatestRevisionDate=17-Jul-2002, LatestRevisionNote="Re-released for DXP Platform.", Publisher="Altium Limited"
P?: library part CMP-1024-00379-1, "0.025\" SQ Post Header, Through-hole, Vertical, -55 to 125 degC, 2.54 mm Pitch, 12-Pin, Male, RoHS", Manufacturer=Samtec, Temperature Range="-55 to 125 degC", ComponentLink1Description="Manufacturer URL", ComponentLink1URL=http://www.samtec.com, ComponentLink2Description=Datasheet, ComponentLink2URL=http://www.samtec.com/documents/webfiles/pdf/TSW_TH.PDF, ComponentLink3Description="Package Specification", ComponentLink3URL=http://www.samtec.com/documents/webfiles/cpdf/TSW-XXX-XX-XXX-X-XX-XXX-MKT.pdf, DatasheetVersion=F-214, Mounting Technology=Through-hole, Orientation=Vertical, PackageDescription=".025[0.64] SQ. Post Terminal Strip Assembly", PackageReference=TSW-106-07-X-D, PackageVersion="DM, 8/1988", PartNumber=TSW-106-07-G-D, Pitch="2.54 mm", RoHS=True
PH1 PH2: library part CMP-1502-01086-1, "THT Vertical Pin Header WR-PHD, Pitch 2.54 mm, Single Row, 12 pins", Contact Resistance=20mOhm, Manufacturer="Wurth Elektronik", Operating Temperature=-40to105degC, Rated Current=3A, Withstanding Voltage=500VAC, Working Voltage=250VAC, Datasheet URL=https://katalog.we-online.de/em/datasheet/6130xx11121.pdf, Gender=Male, Manufacturer URL=http://www.we-online.de, Mounting Technology=THT, Orientation=Vertical, Package Reference=61301211121, Packaging=Bag, Part Number=61301211121, Pin Number=12, Pitch=2.54mm, Publisher=WurthElektronik, Row Number=Single
"Rach C2_4": library part CMP-06035-011753-1, "Chip Multilayer Ceramic Capacitors for General Purpose, 1206, 20000pF, C0G, 30ppm/°C, 5%, 50V", Capacitance=20nF, Case Code (Imperial)=1206, Case Code (Metric)=3216, Dielectric=C0G, Max Operating Temperature=125°C, Min Operating Temperature=-55°C, Package Quantity=1, Temperature Coefficient=30ppm/°C, Tolerance=5%, Voltage=50V, Case/Package=1206, Depth=1.6mm, Height=0.85mm, Lead Free="Lead Free", Length=3.2mm, Mount="Surface Mount", Packaging="Tape and Reel", Radiation Hardening=No, Termination=SMD/SMT, Thickness=0.037inch, Voltage Rating=50V, Voltage Rating (DC)=50V, Width=0.063inch
Rauch Soustracteur: library part CMP-0384-01629-1, "Double Channel Very Low Input Bias Current Operational Amplifier, 3.5 MHz BW, 3 V/us SR, Industrial, 8-pin SOP (RM-8), Tube", Amplifiers Per Package=2, Generic Part Number=AD8642, Input Bias Current=250fA, Input Offset Voltage=50uV, Manufacturer="Analog Devices", Code_JEDEC=MO-187-AA, ComponentLink1Description="Manufacturer URL", ComponentLink1URL=http://www.analog.com/en/index.html, ComponentLink2Description=Datasheet, ComponentLink2URL=http://www.analog.com/static/imported-files/data_sheets/AD8641_8642_8643.pdf, ComponentLink3Description="Package Specification", ComponentLink3URL=http://www.analog.com/static/imported-files/packages/PKG_PDF/MSOP%28RM%29/RM_8.pdf, DatasheetVersion="Rev. E", Iq/Amp=290uA, Mounting Technology="Surface Mount", PackageDescription="8-Pin Mini Small Outline Package, Body 3 x 3 mm, Pitch 0.65 mm", PackageReference=RM-8, PartNumber=AD8642ARMZ, Slew Rate=3V/us, Small Signal Bandwidth=3.5MHz, V Span Max=26V, V Span Min=5V
"Rauch C2_1": library part CMP-2007-00338-2, "CAP CER 0.022UF 50V X7R 0805", Capacitance="22,000 pF", Manufacturer=KEMET, Package=C0805C-DN, Temperature="-55°C to +125°C", Temperature Characteristic=X7R, Temperature Coefficient=30ppm/°C, Temperature Range High=+125°C, Temperature Range Low=-55°C, Tolerance=0.1, Voltage Rating="50 V", Automotive=No, Category=Cap, ComponentLink2Description=Datasheet, ComponentLink2URL=https://content.kemet.com/datasheets/KEM_C1003_C0G_SMD.pdf, Device Class L1="Passive Components", Device Class L2=Capacitors, Device Class L3="Ceramic Capacitors", Digikey Description="CAP CER 0.022UF 50V X7R 0805", Height=0.88mm, Ipc Land Pattern Name=CAPC200125X78, Lead Free=Yes, Manufacturer Part Number=C0805C223K5RACTU, Material=Ceramic, Mouser Description="Capacitor; Ceramic; Cap; .022uF; Tol 10%; SMT; Vol-Rtg 50V; X7R; Tape and Reel", Octopart=https://octopart.com/c0805c223k5ractu-kemet-145968, RoHS=TRUE
"Rauch C2_3": library part CMP-2000-06370-2, "Chip Multilayer Ceramic Capacitors for General Purpose, 2220, 1.0uF, X7R, 15%, 10%, 250V", Capacitance=1uF, Case Code (Imperial)=2220, Case Code (Metric)=5750, Dielectric=X7R, Max Operating Temperature=125°C, Min Operating Temperature=-55°C, Package Quantity=1, Tolerance=10%, Voltage=250V, Case/Package=2220, Depth=5mm, Height=2mm, Lead Free="Lead Free", Length=5.7mm, Material=Ceramic, Mount="Surface Mount", Number of Pins=2, Packaging="Tape and Reel", REACH SVHC="No SVHC", Termination=SMD/SMT, Thickness=0.087inch, Voltage Rating=250V, Voltage Rating (DC)=250V, Width=5mm
"Rauch R2_parraC": library part CMP-2001-00028-1, Manufacturer=Panasonic, Part Number=ERJ-6ENF2003V
RDRDY RRX? RTX: library part CMP-2001-00645-1, Manufacturer=Panasonic, Part Number=ERA6AEB473V
REF5V: library part CMP-09137-000020-1, "IC VREF SERIES 0.05% 8CLCC", Case/Package=CLCC, Max Operating Temperature=125°C, Min Operating Temperature=-40°C, Min Output Voltage=4.096V, Operating Supply Current=7.5mA, Output Current=5mA, Package Quantity=576, Temperature Coefficient=5ppm/°C, Tolerance=0.05%, Mount="Surface Mount", Number of Pins=8, Output Type=Fixed, Packaging=Tray, REACH SVHC="No SVHC", Reference Type=Series, Reference Voltage=4.096V, RoHS Compliant=Yes
REF_C2: library part CMP-2007-03243-2, "CAP CER 10UF 10V X5R 0805", 3DS Part Number=220-00001, Capacitance=10uF, Manufacturer=Kemet, Package=C0805C-DG, Temperature="-55°C to +85°C", Temperature Characteristic=X5R, Temperature Coefficient=15%, Temperature Range High=+85°C, Temperature Range Low=-55°C, Tolerance=10%, Voltage=10V, Automotive=No, Category=Cap, ComponentLink2Description=Datasheet, ComponentLink2URL=https://content.kemet.com/datasheets/KEM_C1006_X5R_SMD.pdf, Device Class L1="Passive Components", Device Class L2=Capacitors, Device Class L3="Ceramic Capacitors", Digikey Description="CAP CER 10UF 10V X5R 0805", Height=1.4mm, Ipc Land Pattern Name=CAPC200125X125, Lead Free=Yes, Manufacturer Part Number=C0805C106K8PACTU, Material=Ceramic, Mouser Description="CAP CER 10UF 10V X5R 0805", Octopart=https://octopart.com/c0805c106k8pactu-kemet-98697, RoHS=TRUE, Voltage Rating=10V
RSCL? RSDA?: library part CMP-1568-00001-1, "General Puprose Chip Resistor, 4700 Ohm +/- 1%, 0.125 W, -55 to 155 degC, 2-Pin SMD, RoHS, Tape and Reel", Power="0.125 W", Resistance="4700 Ohm", Temperature Max="155 degC", Temperature Min="-55 degC", Tolerance="+/- 1%", ComponentLink1Description="Manufacturer URL", ComponentLink1URL=http://www.yageo.com/NewPortal/_en/index.jsp, ComponentLink2Description=Datasheet, ComponentLink2URL=http://www.yageo.com/documents/recent/PYu-RC_Group_51_RoHS_L-3.pdf, DatasheetVersion="Rev. 3", Mounting Technology="Surface Mount", PackageDescription="2-Pin Surface Mount Device, Body 2 x 1.25 mm", Packing="Tape and Reel", PartNumber=RC0805FR-074K7L, RoHS=TRUE
S_C3_sig: library part CMP-13271-001211-1, "Cap Ceramic 220pF 500V C0G ±5% SMD 1206 +125°C Embossed T/R", Capacitance=220pF, Case/Package=1206, Dielectric=C0G, Max Operating Temperature=125°C, Min Operating Temperature=-55°C, Package Quantity=10000, Tolerance=5%, Voltage Rating=500V, Depth=1.6mm, Height=1.25mm, Length=3.2mm, Mount="Surface Mount", Packaging="Tape and Reel", Radiation Hardening=No, Thickness=0.055inch, Voltage Rating (DC)=500V, Width=0.063inch
S_R4_OUT: library part CMP-1013-00510-2, Manufacturer="Vishay Dale", Part Number=CRCW08051K00FKEA
S_R5: library part CMP-2001-04437-1, Manufacturer=Panasonic, Part Number=ERJ-6ENF1500V
S_R_GUARD: library part CMP-2001-04899-2, "RES Thick Film, 100kΩ, 1%, 0.125W, 100ppm/°C, 0805", Case Code (Imperial)=0805, Case Code (Metric)=2012, Max Operating Temperature=155°C, Min Operating Temperature=-55°C, Package Quantity=5000, Power Rating=125mW, Resistance=100kR, Temperature Coefficient=100ppm/°C, Tolerance=1%, Voltage Rating=150V, Case/Package=0805, Composition="Thick Film", Contact Plating=Tin, Depth=1.25mm, Height=0.45mm, Lead Free="Lead Free", Length=2mm, Military Standard=Not, Mount="Surface Mount", Number of Pins=2, Packaging="Tape and Reel", Radiation Hardening=No, Termination=SMD/SMT, Voltage Rating (DC)=150V, Weight=0.000194oz, Width=1.25mm
Sous_R1: library part CMP-2001-03703-2, "RES Thick Film, 240kΩ, 1%, 0.125W, 100ppm/°C, 0805", Case Code (Imperial)=0805, Case Code (Metric)=2012, Max Operating Temperature=155°C, Min Operating Temperature=-55°C, Package Quantity=5000, Power Rating=125mW, Resistance=240kR, Temperature Coefficient=100ppm/°C, Tolerance=1%, Voltage Rating=150V, Case/Package=0805, Composition="Thick Film", Contact Plating=Tin, Depth=1.25mm, Height=0.45mm, Length=2mm, Military Standard=Not, Packaging="Tape and Reel", Radiation Hardening=No, Termination=SMD/SMT, Weight=0.000194oz, Width=1.25mm
Sous_R4: library part CMP-2003-01810-2, "RES Thick Film, 150kΩ, 1%, 0.25W, 100ppm/°C, 1206", Case Code (Imperial)=1206, Case Code (Metric)=3216, Max Operating Temperature=155°C, Max Power Dissipation=250mW, Min Operating Temperature=-55°C, Package Quantity=10, Resistance=150kR, Temperature Coefficient=100ppm/°C, Tolerance=1%, Voltage Rating=200V, Case/Package=1206, Composition="Thick Film", Contact Plating=Tin, Depth=1.6mm, Features="Automotive AEC-Q200", Height=0.55mm, Lead Free="Lead Free", Length=3.2mm, Military Standard=Not, Mount="Surface Mount", Number of Terminations=2, Packaging="Tape and Reel", Power Rating=250mW, Radiation Hardening=No, Termination=SMD/SMT, Voltage Rating (DC)=200V, Weight=0.000353oz, Width=0.063inch
Soust_R2: library part CMP-2003-04449-1, Manufacturer=Panasonic, Part Number=ERA8AEB274V
Soust_R3: library part CMP-2001-04928-2, "RES Thick Film, 120kΩ, 1%, 0.125W, 100ppm/°C, 0805", Case Code (Imperial)=0805, Case Code (Metric)=2012, Max Operating Temperature=155°C, Max Power Dissipation=125mW, Min Operating Temperature=-55°C, Package Quantity=10, Resistance=120kR, Temperature Coefficient=100ppm/°C, Tolerance=1%, Voltage Rating=150V, Case/Package=0805, Composition="Thick Film", Contact Plating=Tin, Depth=1.25mm, Features="Automotive AEC-Q200", Height=0.45mm, Lead Free="Lead Free", Length=2mm, Military Standard=Not, Mount="Surface Mount", Number of Terminations=2, Packaging="Tape and Reel", Power Rating=125mW, Radiation Hardening=No, Termination=SMD/SMT, Voltage Rating (DC)=150V, Weight=0.000194oz, Width=0.049inch

## Free pads (board coordinates)
  round 60 hole 30: 2(3385,2485)

## Via types
v1: diameter 50, hole 28, TopSIGN to BottomsSIGN, 1 vias

## Nets (pads, with @x,y where several pads share a name; then routed paths per layer and width w, separated by ;. In a path a pad name is that pad's centre, name@x,y a point inside that pad or via, vN(x,y) a via of type N, cw(c..) or ccw(c..) an arc to the next point about the centre after c; other vN are vias at no path point)
A+5V: ADC.12 ADC_C2.2 Filt_C5P.2 Filter8th.7 P?.12 Rauch.8 Soustracteur.8 Suiveur.5 | length 931.9
  TopSIGN w15: Suiveur.5@3825,3580.47 Suiveur.5
  TopSIGN w30: P?.12 3032.48,3522.48 3767.01,3522.48 Suiveur.5@3825,3580.47
A-5V: "Filt C5N.2" Filter8th.2 P?.10 Rauch.4 Suiveur.3 Suiveur.4 | length 944.7
  TopSIGN w20: Suiveur.3@3775,3423.11 Suiveur.3@3776.81,3424.92 ; Suiveur.4@3823.19,3424.92 3825,3423.11 Suiveur.4
  TopSIGN w30: P?.10 3020,3410 3329.74,3410 3381.96,3357.78 3741.71,3357.78 3775,3391.07 Suiveur.3 ; Suiveur.3@3776.81,3424.92 Suiveur.4@3823.19,3424.92
AC: ADC.11 Sous_R4.2 Soustracteur.1
AGND: "Filt C1.2" "Filt C1GND.1" "Filt C5N.1" "Rauch R1GND.1" ADC.1 ADC.2 ADC.4 ADC.5 ADC.6 ADC.8 ADC.10 ADC_C2.1 D1.C Filt_C1.1 Filt_C5P.1 Filter8th.6 P?.9 Rauch.3 REF5V.3 REF5V.4 REF5V.5 REF5V.8 REF_C2.2 S_C3_sig.2 Soust_R3.1 Soustracteur.4 | length 1148.1
  TopSIGN w15: S_C3_sig.2 3927.37,3502.37 4002.63,3502.37 v1(4005,3500)
  BottomsSIGN w15: P?.9 3077.62,3352.38 3123.01,3352.38 3425,3050.39 REF5V.3 3425,3018.9 3431.28,3012.62 3433.31,3012.62 3459.65,2986.28 REF5V.4 REF5V.4@3443.9,2950 ; Filt_C1.1 3256.14,2935.47 3270.67,2950 REF5V.8 REF5V.4@3443.9,2950 ; REF_C2.2 3394.53,2829.07 3408.78,2843.33 3418.72,2843.33 3425,2849.61 REF5V.5 3425,2931.1 REF5V.4@3443.9,2950
D3V3: ADC.3 ADC.13 ADC_C1.2 C?.1 Clock.4 P?.6 PH2.12 RSCL?.1 RSDA?.1 | length 115.7
  BottomsSIGN w15: C?.1@4104.76,2190.24 Clock.4@4104.76,2305.63 ; 4204.53,2500 4204.76,2500.24
DGND: ADC_C1.1 BT?.1 C?.2 Clock.15 P?.11 PH1.12
GUARD: C_high_volt.2 S_R_GUARD.1 Suiveur.1 Suiveur.2 Suiveur.7 | length 220
  TopSIGN w15: C_high_volt.2@3742.64,4131.71 C_high_volt.2
  TopSIGN w40: C_high_volt.2@3742.64,4131.71 3775,4099.35 S_R_GUARD.1
GUARD_EXT: P1.1 S_R_GUARD.2 | length 494
  TopSIGN w15: S_R_GUARD.2@3765.16,3851.61 S_R_GUARD.2
  TopSIGN w40: P1.1 3743.54,3830 S_R_GUARD.2@3765.16,3851.61
NetADC_14: ADC.14 RDRDY.2 | length 448.2
  TopSIGN w15: ADC.14 4227.19,2727.42 4227.19,2632.81 4275,2585 RDRDY.2
NetADC_15: ADC.15 RRX?.2 | length 424.1
  TopSIGN w15: ADC.15 4201.02,2750.83 4210.04,2759.85 4210.04,2761.24 4216.2,2767.4 4364.98,2767.4 4442.37,2690 RRX?.2
NetADC_16: ADC.16 RTX.2 | length 429.1
  TopSIGN w15: ADC.16 4176,2728.56 4176,2752.79 4206.61,2783.4 4551,2783.4 RTX.2
NetBT?_2: BT?.2 BT?.3 Clock.16 | length 2499
  BottomsSIGN w15: BT?.3 3830,3525 4175,3180 ; Clock.16 4055,3060 4175,3180 ; BT?.2 4730,3840 4638.5,3748.5 4638.5,3403.5 4415,3180 4175,3180
NetC_high_volt_1: C_high_volt.1 P1.2 | length 827.5
  TopSIGN w15: C_high_volt.1 C_high_volt.1@3451.57,4130.79
  BottomsSIGN w40: P1.2@3388.43,3731.57 3191.57,3731.57 3191.57,3928.43 3388.43,3928.43 3388.43,4076.06 C_high_volt.1
NetClock_17: Clock.17 PH2.1 RSDA?.2 | length 816.4
  BottomsSIGN w15: Clock.17@4105,2630.67 4191.3,2544.37 RSDA?.2 4364.92,2544.37 4390.55,2570 PH2.1
NetClock_18: Clock.18 Clock.20 PH2.2 RSCL?.2 | length 737
  BottomsSIGN w15: Clock.18@4156.65,2706.46 4168.1,2717.91 RSCL?.2@4355.83,2717.91 ; RSCL?.2 4364.92,2713.74 4408.66,2670 PH2.2
NetD1_A: D1.A D2.A | length 78
  TopSIGN w15: D1.A 4333.01,3606 4394,3606 D2.A
"NetFilt C1_1": "Filt C1.1" Filter8th.1 | length 100.4
  TopSIGN w15: 3612.56,3050 3612.56,3048.03 3630.59,3030 Filter8th.1
"NetFilt C1GND_2": "Filt C1GND.2" Filt_R2OUT.1 Filt_R3OUT.1 R1OUT.2 | length 612.5
  TopSIGN w15: Filt_R3OUT.1 3584.37,2789.92 3629.69,2835.24 3629.69,2873.08 3658.88,2902.28 3748.2,2902.28 3761.26,2889.23 3761.26,2870.77 3712.53,2822.04 ; Filt_R2OUT.1 3675.63,2789.92 3691.75,2806.04 3696.53,2806.04 3712.53,2822.04 ; R1OUT.2 3890.08,2745.63 3813.67,2822.04 3712.53,2822.04
"NetFilt C1OUT_1": "Filt C1OUT.1" Filt_R2OUT.2 Filter8th.4 | length 380.8
  TopSIGN w15: 3657.56,2690 3657.56,2691.97 ; Filter8th.4 3703.54,2843.72 3690.22,2830.39 3656.84,2830.39 3643.51,2817.06 3643.51,2752.94 3657.56,2738.88 3657.56,2691.97 ; Filt_R2OUT.2 3754.37,2780.08 3738.25,2763.96 3725.64,2763.96 3685.63,2723.95 3685.63,2720.04 3657.56,2691.97
"NetFilt C1OUT_2": "Filt C1OUT.2" Filt_R3OUT.2 Filter8th.3 Sous_R1.1 | length 663.5
  TopSIGN w15: 3602.44,2690 3602.44,2691.97 3594.19,2700.22 3585.49,2700.22 Filt_R3OUT.2@3505.63,2780.08 ; Sous_R1.1 3603.63,2590.94 3505.63,2688.94 Filt_R3OUT.2@3505.63,2780.08 ; Filter8th.3 3600,2930 3510,2840 3510,2789.37 Filt_R3OUT.2 Filt_R3OUT.2@3505.63,2780.08
NetFilter8th_5: Filter8th.5 R1OUT.1
NetFilter8th_8: "Rach C2_4.2" "Rauch C2_1.2" "Rauch C2_2.2" "Rauch R2_parraC.2" Filter8th.8 Rauch.1 | length 744.6
  TopSIGN w15: Filter8th.8 4061.51,3030 4063.12,3028.39 Rauch.1 ; 4210.51,3095 4395.25,3095 4455.1,3154.86 4465.98,3154.86 4480.25,3169.12 4480.25,3180 4480.25,3235.14 4465.73,3249.66 4465.73,3283.8 4454.53,3295 4452.03,3297.5 4452.03,3397.5 4449.53,3400
NetPH1_10: PH1.10 RRX?.1 | length 968
  TopSIGN w15: RRX?.1 4637.4,2692.95 4749,2804.55 4749,3300.56 4858.43,3410 4930,3410 PH1.10
NetPH1_11: PH1.11 RTX.1 | length 963
  TopSIGN w15: RTX.1 4637.4,3288.96 4858.43,3510 4930,3510 PH1.11
NetPH2_9: PH2.9 RDRDY.1 | length 890.3
  TopSIGN w15: RDRDY.1 4635,2587.95 4795,2747.95 4795,3300 4865,3370 PH2.9
"NetRach C2_4_1": "Rach C2_4.1" "Rauch C1.2" "Rauch C2_1.1" "Rauch C2_2.1" "Rauch C2_3.1" "Rauch R1GND.2" | length 697.3
  TopSIGN w15: 4135,3405 4167.03,3405 ; 4189.06,3505 4189.06,3427.03 4167.03,3405 ; 4324.37,3270 4340.49,3253.88 4340.49,3230.14 4379.75,3190.88 ; 4379.75,3180 4379.75,3190.88 ; 4167.03,3405 4385.47,3405 4390.47,3400 4392.97,3397.5 4392.97,3297.5 4395.47,3295 4395.47,3206.59 4379.75,3190.88
"NetRauch C2_3_2": "Rauch C2_3.2" "Rauch R2_parraC.1" Rauch.2 | length 220.5
  TopSIGN w15: Rauch.2 4128.08,3002.8 4149.49,3024.2 4149.49,3095 4149.49,3162.17 4135,3176.65
NetS_R4_OUT_1: S_R4_OUT.1 Suiveur.6 | length 88.5
  TopSIGN w15: Suiveur.6 3775,3634.41 3779.31,3638.72 3779.8,3638.72 3788.58,3647.51 S_R4_OUT.1
NetS_R5_1: S_R5.1 Suiveur.8 | length 440
  TopSIGN w15: Suiveur.8 3675,3700 3715,3740 3938.39,3740 3980.51,3697.87 S_R5.1
NetSous_R1_2: Sous_R1.2 Sous_R4.1 Soustracteur.2 | length 232.7
  TopSIGN w15: Sous_R4.1 3714.8,2670.24 3686.37,2641.81 Sous_R1.2 3770.92,2585 3773.12,2582.8 Soustracteur.2
NetSoust_R2_2: Soust_R2.2 Soust_R3.2 Soustracteur.3 | length 246
  TopSIGN w15: Soust_R3.2 3706.18,2389.81 Soust_R2.2 3706.18,2496.81 3720.33,2510.96 3727.62,2510.96 3773.86,2557.2 Soustracteur.3
REF5V: ADC.9 P?.8 pad.2 REF5V.6 REF5V.7 REF_C2.1 Soust_R2.1 | length 1432.9
  TopSIGN w15: pad.2 Soust_R2.1
  BottomsSIGN w15: P?.8 2930.99,3220.99 2930.99,2943.84 3009.47,2865.35 REF5V.7 ; REF5V.6 REF5V.7 ; pad.2 3335.47,2534.53 REF_C2.1 3330.24,2785.24 3330.24,2860.12 REF5V.7
REFALIM: Filt_C1.2 P?.4 REF5V.1 REF5V.2 | length 448.7
  BottomsSIGN w15: P?.4 3020,3010 3171.65,3010 3187.13,2994.53 3202.87,2994.53 3242.99,3034.65 REF5V.1 REF5V.2
SIG: "Rauch C1.1" D2.C S_C3_sig.1 S_R4_OUT.2 S_R5.2 | length 699.1
  TopSIGN w15: S_R4_OUT.2 S_R5.2 3919.49,3610.76 S_C3_sig.1 3982.37,3605.25 4063.55,3524.07 4118.8,3524.07 4130,3512.87 ; 4130,3505 4130,3512.87 ; D2.C 4399.8,3487.99 4347.72,3540.07 4157.2,3540.07 4130,3512.87
pads on no net: ADC.7 Clock.1 Clock.2 Clock.3 Clock.5 Clock.6 Clock.7 Clock.8 Clock.9 Clock.10 Clock.11 Clock.12 Clock.13 Clock.14 Clock.19 P?.1 P?.2 P?.3 P?.5 P?.7 PH1.1 PH1.2 PH1.3 PH1.4 PH1.5 PH1.6 PH1.7 PH1.8 PH1.9 PH2.3 PH2.4 PH2.5 PH2.6 PH2.7 PH2.8 PH2.10 PH2.11 Rauch.5 Rauch.6 Rauch.7 Soustracteur.5 Soustracteur.6 Soustracteur.7

## Polygon pours and split planes (outlines as drawn)
AGND on TopSIGN "AGND_L01_P000" (solid, pour order 0): 2824.11,3180 ccw(c4105,3180) 4105,1899.11 ccw(c4105,3180) 5385.89,3180 ccw(c4105,3180) 4105,4460.89 ccw(c4105,3180)
DGND on BottomsSIGN "DGND_L06_P001" (solid, pour order 1): 2824.11,3180 ccw(c4105,3180) 4105,1899.11 ccw(c4105,3180) 5385.89,3180 ccw(c4105,3180) 4105,4460.89 ccw(c4105,3180)
AGND on TopGND "AGND_L02_P002" (solid, pour order 2): 2824.11,3180 ccw(c4105,3180) 4105,1899.11 ccw(c4105,3180) 5385.89,3180 ccw(c4105,3180) 4105,4460.89 ccw(c4105,3180)
D3V3 on 3V3 "D3V3_L03_P003" (solid, pour order 3): 2824.11,3180 ccw(c4105,3180) 4105,1899.11 ccw(c4105,3180) 5385.89,3180 ccw(c4105,3180) 4105,4460.89 ccw(c4105,3180)

## Silkscreen, mask and mechanical layers (free items; w line width, h text height)
Top Overlay:
  text "Tigresse-2 / Experiment" at 4315.09,2195 h60
Bottom Overlay:
  drawing of 21 lines, arcs and shapes, not listed
  text "Tigresse-2  / Experiment" at 4287.5,2195 h60
Outline layer:
  circle w10: c4105,3180 r1280.89

## Text inside footprints (layer, text, board x,y; h text height)
PH1: Top Overlay "12" at 4923.07,3645.2 h40 r90; Top Overlay "1" at 4923.07,2565.28 h40 r90
PH2: Top Overlay "12" at 4808.07,3645.2 h40 r90; Top Overlay "1" at 4808.07,2565.28 h40 r90